# EAGLE board LimeRFE Controller (EAGLE 7.7.0)
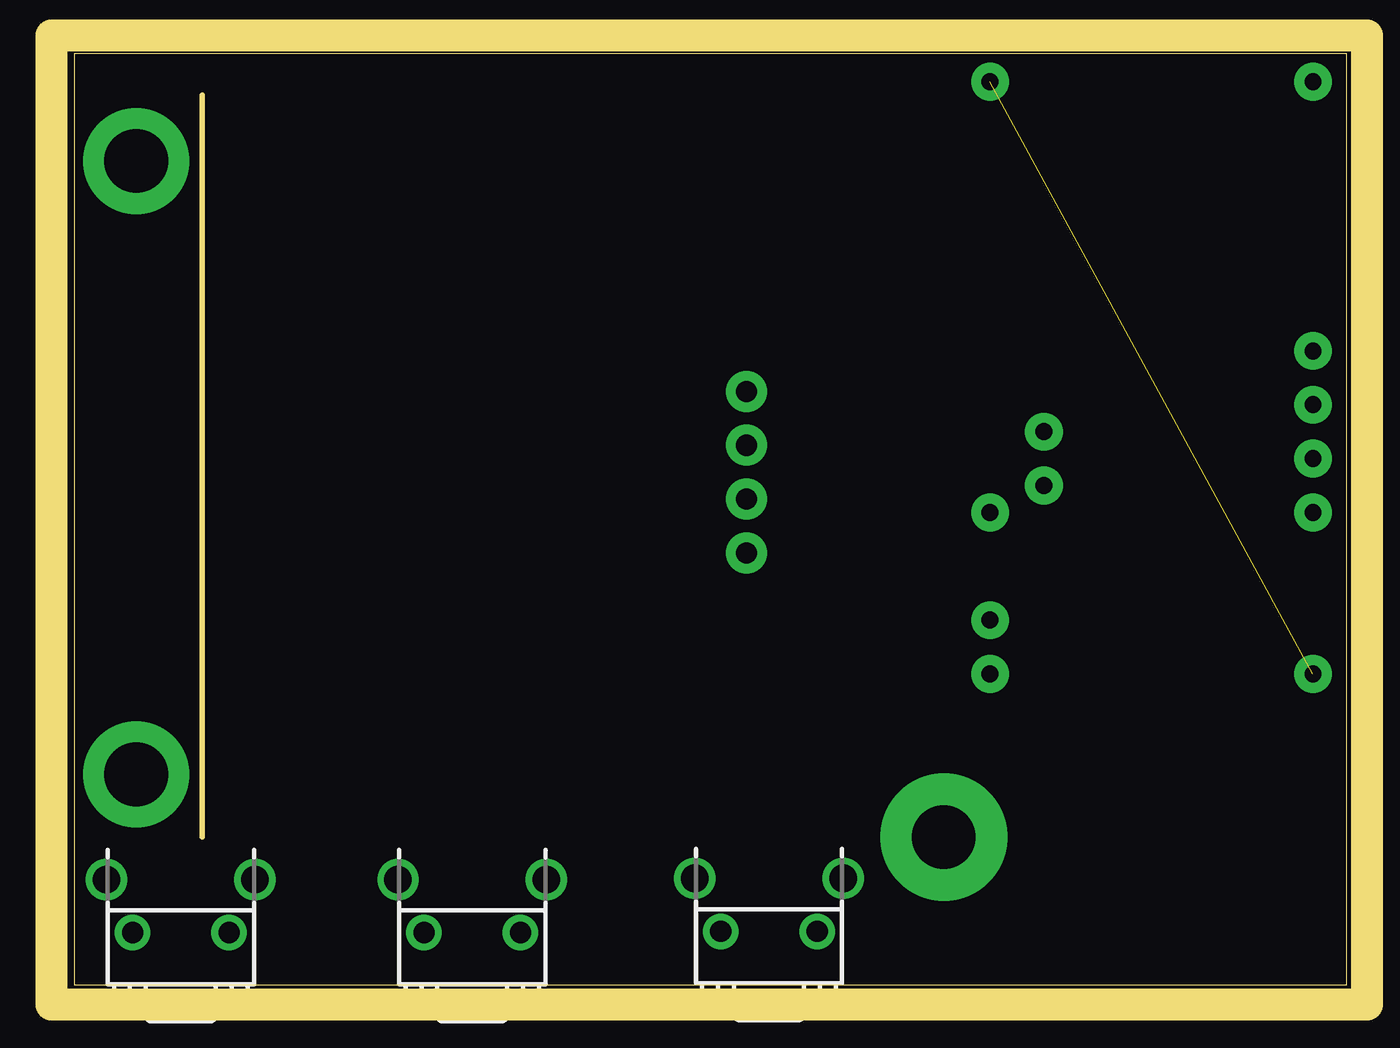
[diagram p0: board, top side]
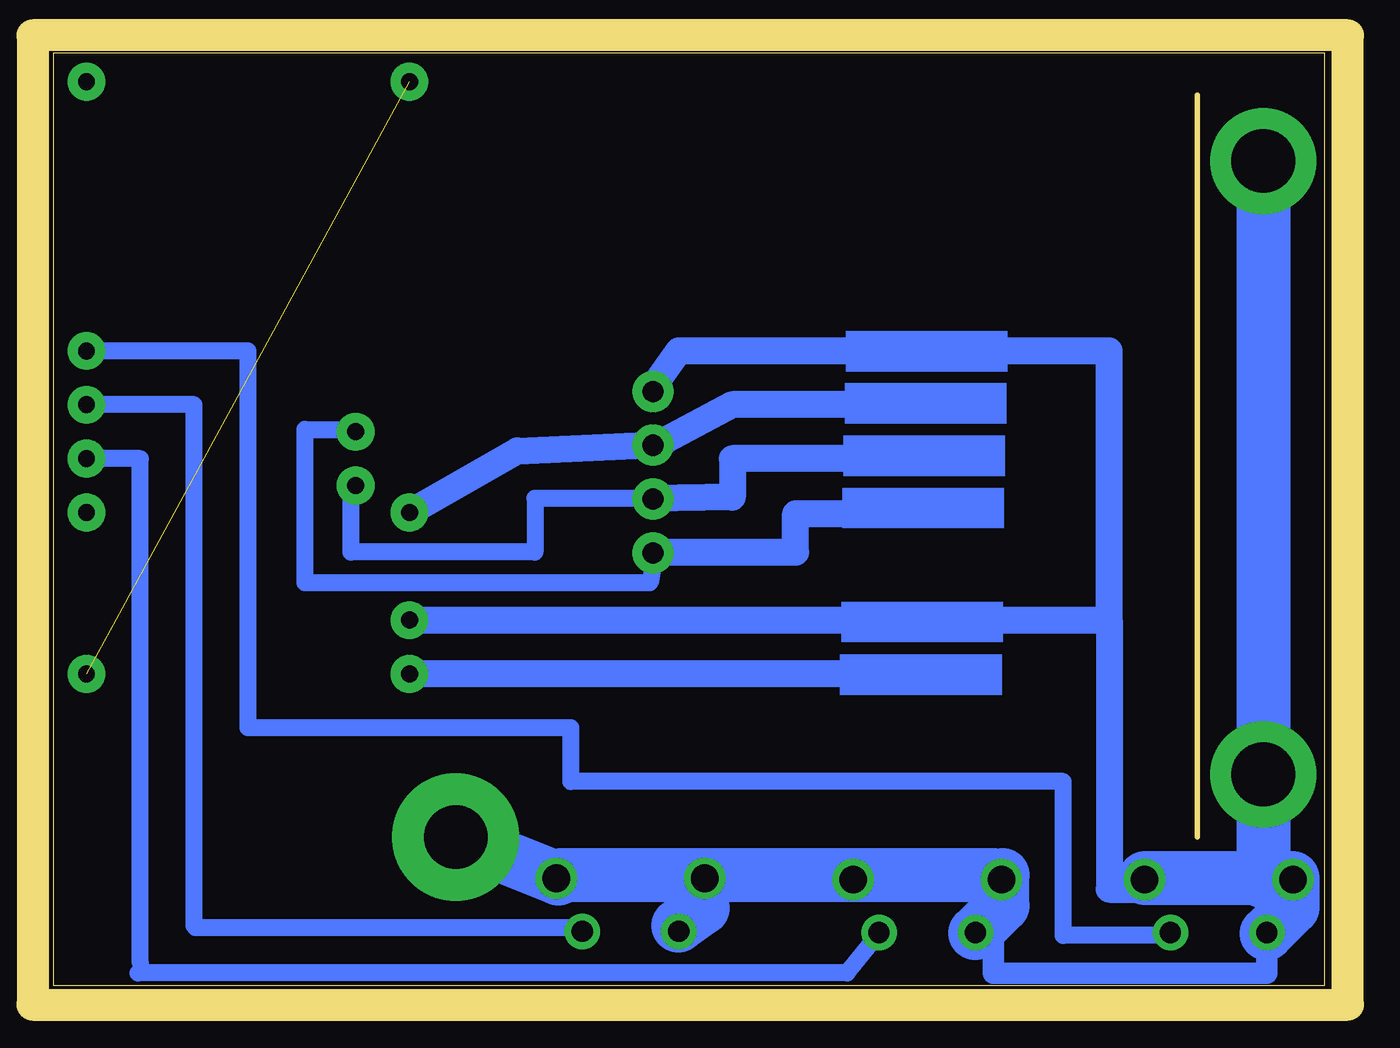
[diagram p1: board, bottom side, seen from below]

Size 60 x 44 mm. Coordinates in mm from the lower left corner, seen from the top.
Outline: 0,0 0,44 60,44 60,0 0,0
Copper layers (1*16): Top 0.035mm / dielectric 1.5mm / Bottom 0.035mm
Design rules "default": minimum track width 10mil, minimum drill 24mil, track to track 8mil, track to pad 8mil, pad to pad 8mil, via to via 8mil, smd to smd 8mil, copper to edge 40mil, drill to drill 8mil, minimum pad ring 10mil, minimum via ring 8mil, stop-mask expansion 4mil, vias tented up to drill 0mil, thermal gap 10mil
Milling: 5 lines

## Footprints (pad centres in the part's own frame; a part is rotated, then mirrored left to right if it is on the bottom)
TL1105L-4,3 = drill 1 pad 1.676: 1 -2.275,0; 2 2.275,0 | drill 1.3 pad 1.9: 3 -3.5,2.5; 4 3.5,2.5

## Placement (x,y rotation side)
E$1  [TL1105L-4,3]  18.75,2.5 0 top
E$2  [TL1105L-4,3]  32.75,2.55 0 top
E$3  [TL1105L-4,3]  5,2.5 0 top

## Library data of the parts
E$1-E$3 = switch

## Tracks (layer width: path | path; a pad name or v marks a point on that pad's centre or on a via)
S$1  (via drill 3 pad 6)
  other vias: 41,7
S$2  (via drill 0.8 pad 1.78)  (1 unrouted)
  other vias: 43.18,42.64 58.42,14.7
S$3
  Bottom 0.406: 35.08,2.65 35.67,2.72
  Bottom 0.813: 35.67,2.72 53.27,2.72
S$4
  Bottom 1.27: 17.78,17.24 10.16,17.24 | 10.16,17.24 10.16,29.94 17.78,29.94 | 10.16,17.24 10.16,4.54 7.62,4.54
S$5
  Bottom 1.27: 20.32,29.94 30.48,29.94 31.83,28.05
S$6  (via drill 0.8 pad 1.78)
  Bottom 0.406: 55.98,0.59 55.88,1.06
  Bottom 0.813: 21.03,2.46 22.54,0.59 55.98,0.59 | 55.88,1.06 55.88,24.86 v58.42,24.86
S$7  (via drill 0.8 pad 1.78)
  Bottom 1.27: v43.18,22.32 38.1,25.22 31.47,25.51 27.94,27.4 20.32,27.4
S$8  (via drill 1 pad 1.93)
  other vias: 31.69,25.49
S$9  (via drill 1 pad 1.93)
  other vias: 31.69,22.95
S$10  (via drill 1 pad 1.93)
  other vias: 31.69,20.41
S$11  (via drill 1 pad 1.93)
  other vias: 31.69,28.03
S$12  (via drill 0.8 pad 1.78)
  Bottom 0.406: 53.3,2.79 53.34,2.82
  Bottom 0.813: 53.34,2.82 53.34,27.4 v58.42,27.4
S$13  (via drill 0.8 pad 1.78)
  Bottom 0.406: 7.37,2.39 7.76,2.36
  Bottom 0.813: 7.76,2.36 12.34,2.36 12.34,9.62 35.56,9.62 35.56,12.16 50.8,12.16 50.8,29.94 v58.42,29.94
S$14
  Bottom 2.54: 1.53,5 1.6,5.06 8.46,5.06
S$15
  Bottom 2.54: 2.73,2.46 1.51,3.68 1.51,5.06
S$17  (via drill 0.8 pad 1.78)
  Bottom 1.27: 20.32,14.7 v43.18,14.7
S$18
  Bottom 2.54: 15.25,4.98 15.46,5.2 36.18,5.2
S$19
  Bottom 2.54: 16.48,2.47 15.2,3.76 15.2,5.2
S$20
  Bottom 2.54: 30.5,2.83 29.34,3.65 29.34,5.2
S$21  (via drill 0.8 pad 1.78)
  other vias: 58.42,22.32
S$22
  Bottom 1.016: 2.73,2.48 2.73,0.58 15.64,0.58 15.64,2.5 16.53,2.5
S$23  (via drill 0.8 pad 1.78)
  Bottom 1.27: v43.18,17.24 20.32,17.24
S$24
  Bottom 0.813: 31.83,22.98 37.26,22.98 37.26,20.45 45.94,20.45 45.94,23.7
  Bottom 1.27: 20.32,24.86 27.94,24.86 27.94,23.04 31.83,22.98
S$25
  Bottom 2.54: 36.16,5.04 40.95,6.95
S$26
  Bottom 1.27: 31.83,20.45 24.96,20.45 24.96,22.26 20.62,22.26
S$27
  Bottom 0.813: 31.57,20.5 31.83,19 48.11,19 48.11,26.24 45.58,26.24
S$28  (via drill 3 pad 5)
  Bottom 2.54: v2.89,38.9 2.89,4.89
S$29  (via drill 0.8 pad 1.78)
  other vias: 58.42,42.64
S$30  (via drill 3 pad 5)
  other vias: 2.89,9.96
S$33  (via drill 0.8 pad 1.78)
  other vias: 45.72,23.59
S$34  (via drill 0.8 pad 1.78)
  other vias: 45.72,26.13
(copper drawn outside any net)
  shapes: Bottom area x6